# EAGLE board p128control (EAGLE 9.6.2)
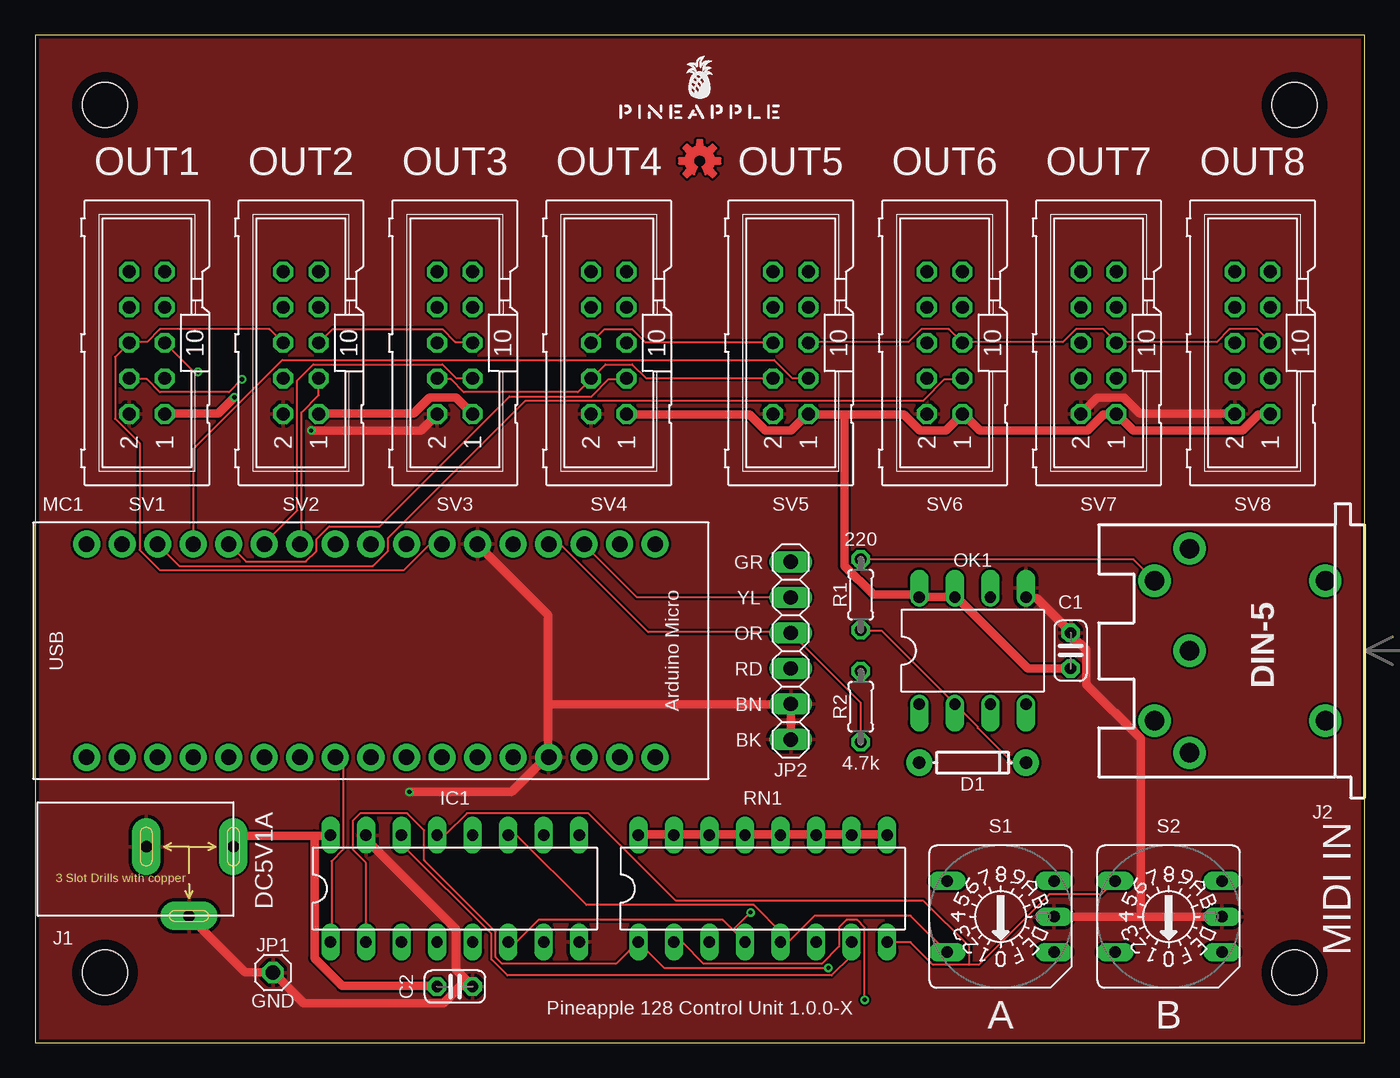
[diagram p0: board, top side]
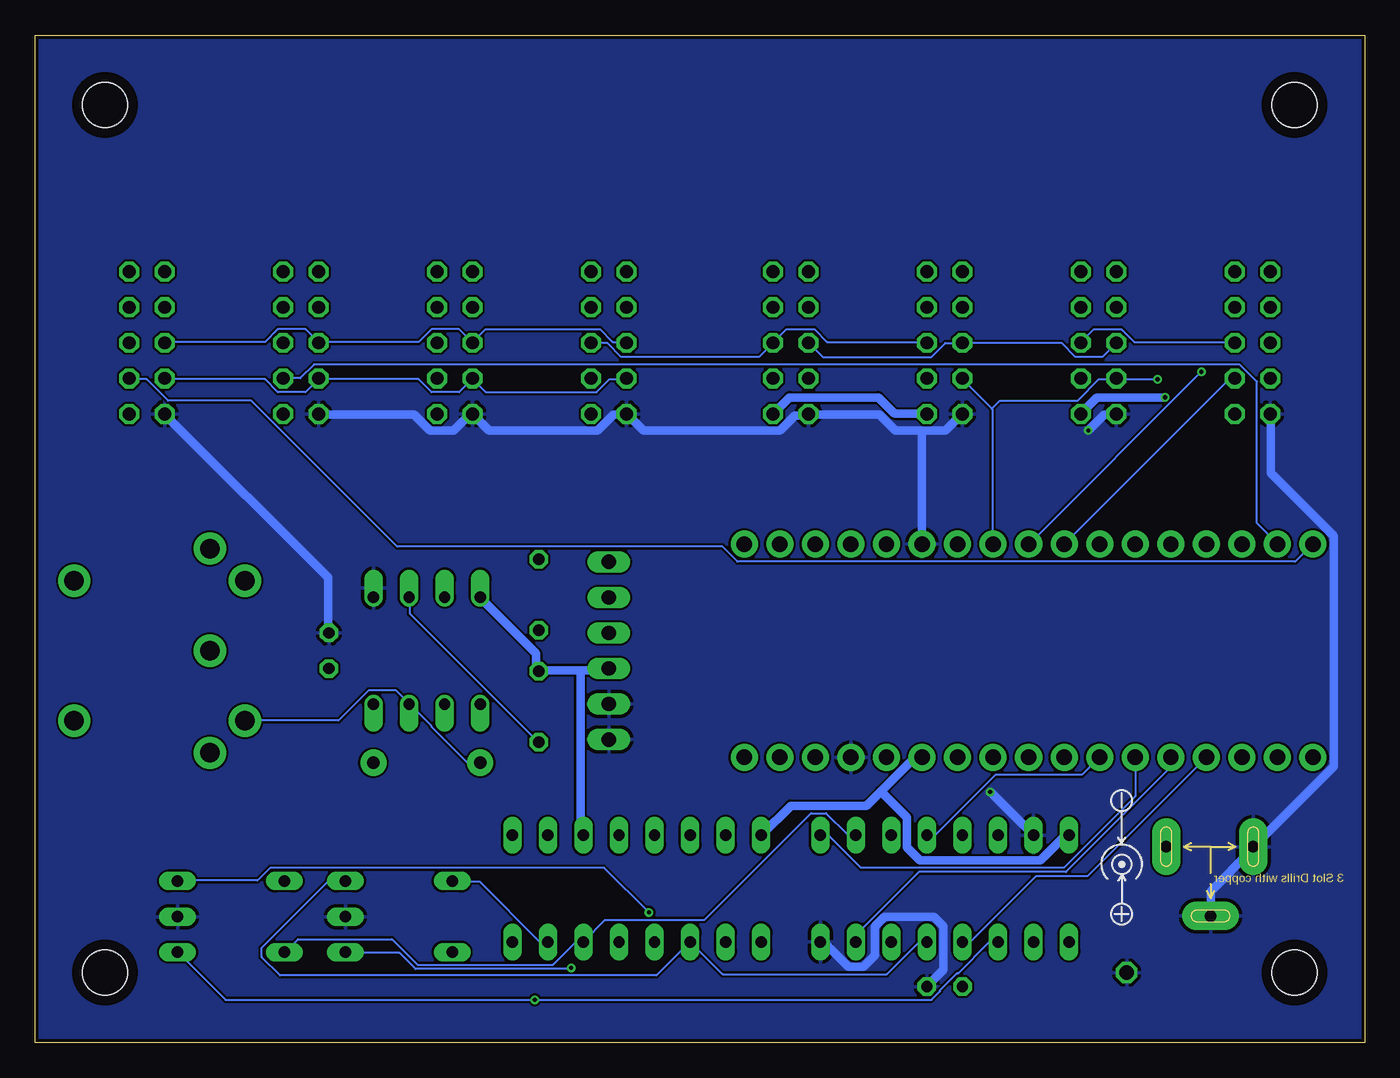
[diagram p1: board, bottom side, seen from below]

Size 95 x 72 mm. Coordinates in mm from the lower left corner, seen from the top.
Outline: 0,0 95,0 95,72 0,72 0,0
Copper layers (1*16): Top 0.035mm / dielectric 1.5mm / Bottom 0.035mm
Design rules "SeeedStudio_2layer_DRU_no_angle_20140221": minimum track width 6mil, minimum drill 12mil, track to track 6mil, track to pad 6mil, pad to pad 6mil, via to via 6mil, smd to smd 0mil, copper to edge 10mil, drill to drill 10mil, minimum pad ring 10mil, minimum via ring 6mil, stop-mask expansion 2mil, vias tented up to drill 100mil, thermal gap 10mil
Net classes: 0 default: width 0.152 mm, drill 0.152 mm, clearance 0.152 mm; 1 gnd: width 0.61 mm, drill 0.152 mm, clearance 0.152 mm; 2 power: width 0.61 mm, drill 0.152 mm, clearance 0.152 mm; 3 analog: width 0.305 mm, drill 0.152 mm, clearance 0.152 mm
Holes 3.2 mm at 5,5 90,5 90,67 5,67
tRestrict: area 2.8,64.8 to 7.2,69.2; area 87.8,64.8 to 92.2,69.2; area 2.8,2.8 to 7.2,7.2; area 87.8,2.8 to 92.2,7.2
bRestrict: area 2.8,2.8 to 7.2,7.2; area 87.8,2.8 to 92.2,7.2; area 87.8,64.8 to 92.2,69.2; area 2.8,64.8 to 7.2,69.2

## Footprints (pad centres in the part's own frame; a part is rotated, then mirrored left to right if it is on the bottom)
C025-024X044 = drill 0.813 octagon: 1 -1.27,0; 2 1.27,0
DIODE-1N4148 = drill 0.9 pad 1.88: A -3.81,0; C 3.81,0
DIL16 = drill 0.813 long: 1 -8.89,-3.81; 2 -6.35,-3.81; 3 -3.81,-3.81; 4 -1.27,-3.81; 5 1.27,-3.81; 6 3.81,-3.81; 7 6.35,-3.81; 8 8.89,-3.81; 9 8.89,3.81; 10 6.35,3.81; 11 3.81,3.81; 12 1.27,3.81; 13 -1.27,3.81; 14 -3.81,3.81; 15 -6.35,3.81; 16 -8.89,3.81
3P-L14.2*W11.0*H9.0MM = drill 0.813 pad 2.032 long: + 3.175,0; -1 -3.048,0; -2 0,-4.953
DIN5-RA-PTH = drill 1.4 pad 2.286: 1 7.3,12.5; 2 0,12.5; 3 -7.3,12.5; 4 5,15; 5 -5,15; 6 -5,2.8; 7 5,2.8
1X01 = drill 1.016 octagon: 1 0,0
1X06 = drill 1.016 long: 1 -6.35,0; 2 -3.81,0; 3 -1.27,0; 4 1.27,0; 5 3.81,0; 6 6.35,0
DIL08 = drill 0.813 offset: 1 -3.81,-3.81; 2 -1.27,-3.81; 3 1.27,-3.81; 4 3.81,-3.81; 5 3.81,3.81; 6 1.27,3.81; 7 -1.27,3.81; 8 -3.81,3.81
0204/5 = drill 0.813 octagon: 1 -2.54,0; 2 2.54,0
A1353HEX = drill 0.813 long: 1 3.81,-2.54; 2 -3.81,2.54; 4 3.81,2.54; 8 -3.81,-2.54; C 3.81,0
ML10 = drill 0.914 octagon: 1 -5.08,-1.27; 2 -5.08,1.27; 3 -2.54,-1.27; 4 -2.54,1.27; 5 0,-1.27; 6 0,1.27; 7 2.54,-1.27; 8 2.54,1.27; 9 5.08,-1.27; 10 5.08,1.27
ARDUINOMICRO = drill 1.1 pad 1.93: P$1 -20.32,7.62; P$2 -17.78,7.62; P$3 -15.24,7.62; P$4 -12.7,7.62; P$5 -10.16,7.62; P$6 -7.62,7.62; P$7 -5.08,7.62; P$8 -2.54,7.62; P$9 0,7.62; P$10 2.54,7.62; P$11 5.08,7.62; P$12 12.7,-7.62; P$13 10.16,-7.62; P$14 12.7,7.62; P$15 15.24,7.62; P$16 17.78,7.62; P$17 20.32,7.62; P$18 20.32,-7.62; P$19 17.78,-7.62; P$20 15.24,-7.62; P$21 7.62,7.62; P$22 10.16,7.62; P$23 7.62,-7.62; P$24 5.08,-7.62; P$25 2.54,-7.62; P$26 0,-7.62; P$27 -2.54,-7.62; P$28 -5.08,-7.62; P$29 -7.62,-7.62; P$30 -10.16,-7.62; P$31 -12.7,-7.62; P$32 -15.24,-7.62; P$33 -17.78,-7.62; P$34 -20.32,-7.62

## Placement (x,y rotation side)
C1  [C025-024X044]  74,28 90 top
C2  [C025-024X044]  30,4 0 top
D1  200mA/100V/1V  [DIODE-1N4148]  67,20 0 top
IC1  74LS158N  [DIL16]  30,11 0 top
J1  [3P-L14.2*W11.0*H9.0MM]  11,14 0 top
J2  DIN5  [DIN5-RA-PTH]  95,28 90 top
JP1  GNDPIN  [1X01]  17,5 0 top
JP2  [1X06]  54,28 90 top
LOGO1  OSHW-LOGOS-COPPER  [OSHW-LOGO-S_COPPER]  47.5,63 0 top
OK1  6N137  [DIL08]  67,28 0 top
R1  220  [0204/5]  59,32 90 top
R2  10k  [0204/5]  59,24 90 top
RN1  10k  [DIL16]  52,11 0 top
S1  [A1353HEX]  69,9 0 top
S2  [A1353HEX]  81,9 0 top
SV1  [ML10]  8,50 90 top
SV2  [ML10]  19,50 90 top
SV3  [ML10]  30,50 90 top
SV4  [ML10]  41,50 90 top
SV5  [ML10]  54,50 90 top
SV6  [ML10]  65,50 90 top
SV7  [ML10]  76,50 90 top
SV8  [ML10]  87,50 90 top
U$1  PINEAPPLE450_SILK  [PINEAPPLE450_SILK]  47.5,66 0 top
U$2  ARDUINOMICRO  [ARDUINOMICRO]  24,28 0 top

## Library data of the parts
C1 C2 R1 R2 = resistor
D1 = SparkFun-DiscreteSemi; PROD_ID: DIO-08378
IC1 = 74xx-us
J1 = Seeed-Connector
J2 = SparkFun-Connectors; PROD_ID: CONN-09481
JP1 JP2 = pinhead
LOGO1 = SparkFun-Aesthetics
OK1 = optocoupler; MPN: 6N137; OC_FARNELL: 1328376; OC_NEWARK: 52M1895
RN1 = resistor-dil; OC_FARNELL: unknown; OC_NEWARK: unknown
S1 S2 = switch-dil; OC_FARNELL: unknown; OC_NEWARK: unknown
SV1-SV8 = con-ml; OC_FARNELL: unknown; OC_NEWARK: unknown
U$1 = pineapple
U$2 = adafruit

## Nets
CLR: SV1.6 SV2.6 SV3.6 SV4.6 SV5.6 SV6.6 SV7.6 SV8.6 U$2.P$11
GND [gnd]: C1.2 C2.2 IC1.8 IC1.15 J1.-1 J1.-2 JP1.1 JP2.1 JP2.2 OK1.5 S1.C S2.C SV1.2 SV2.2 SV3.2 SV4.2 SV5.2 SV6.2 SV7.2 SV8.2 U$2.P$12 U$2.P$21
MIRETN: D1.A J2.5 OK1.3
MISEND: J2.4 R1.2
N$1: D1.C OK1.2 R1.1
RCLK: SV1.5 SV2.5 SV3.5 SV4.5 SV5.5 SV6.5 SV7.5 SV8.5 U$2.P$9
RX: JP2.4 OK1.6 R2.1 U$2.P$14
SCLK: SV1.4 SV2.4 SV3.4 SV4.4 SV5.4 SV6.4 SV7.4 SV8.4 U$2.P$10
SOUT1: SV1.3 U$2.P$8
SOUT2: SV2.3 U$2.P$7
SOUT3: SV3.3 U$2.P$6
SOUT4: SV4.3 U$2.P$5
SOUT5: SV5.3 U$2.P$4
SOUT6: SV6.3 U$2.P$3
SOUT7: SV7.3 U$2.P$2
SOUT8: SV8.3 U$2.P$1
SW1: IC1.4 U$2.P$31
SW2: IC1.7 U$2.P$30
SW4: IC1.9 U$2.P$29
SW8: IC1.12 U$2.P$28
SWA1: IC1.2 RN1.1 S1.1
SWA2: IC1.5 RN1.3 S1.4
SWA4: IC1.11 RN1.5 S1.8
SWA8: IC1.14 RN1.7 S1.2
SWB1: IC1.3 RN1.2 S2.1
SWB2: IC1.6 RN1.4 S2.4
SWB4: IC1.10 RN1.6 S2.8
SWB8: IC1.13 RN1.8 S2.2
SWSEL: IC1.1 U$2.P$27
TX: JP2.5 U$2.P$15
VCC [power]: C1.1 C2.1 IC1.16 J1.+ JP2.3 OK1.7 OK1.8 R2.2 RN1.9 RN1.10 RN1.11 RN1.12 RN1.13 RN1.14 RN1.15 RN1.16 SV1.1 SV2.1 SV3.1 SV4.1 SV5.1 SV6.1 SV7.1 SV8.1 U$2.P$23

## Tracks (layer width: path | path; a pad name or v marks a point on that pad's centre or on a via)
CLR
  Top 0.152: SV2.6 17.68,50.06 16.76,50.98 8.91,50.98 8,50.06 6.78,50.06 SV1.6 6.71,49.99 5.71,49 5.71,44.58 7.47,42.82 7.47,35.2 8.91,33.76 26.36,33.76 28.19,35.59 29.03,35.59 U$2.P$11 | SV5.6 52.65,50.06 43.59,50.06 42.67,50.98 40.69,50.98 39.78,50.06 SV4.6
  Bottom 0.152: SV5.6 52.73,50.06 53.72,50.06 54.63,50.98 62.79,50.98 63.7,50.06 SV6.6 63.78,50.06 64.69,50.98 66.67,50.98 67.59,50.06 74.68,50.06 SV7.6 74.75,50.06 75.67,50.98 77.65,50.98 78.56,50.06 85.72,50.06 SV8.6 | SV4.6 39.7,49.99 38.71,49 30.94,49 29.95,49.99 28.8,49.99 SV3.6 28.65,49.99 21.64,49.99 20.65,49 18.75,49 17.75,49.99 SV2.6
GND  (via drill 0.3)
  Top 0.61: IC1.15 23.7,14.78 23.7,14.48 30.1,8.08 30.1,5.18 31.24,4.04 C2.2 30.63,4.27 29.18,2.82 19.2,2.82 17.22,4.8 JP1.1 16.99,5.03 15.01,5.03 11.05,8.99 J1.-2 | JP2.1 54.03,21.72 54.03,24.16 JP2.2 53.72,24.16 36.65,24.16 | v19.74,43.74 27.58,43.74 28.73,44.88 SV3.2 | 36.65,24.16 36.65,30.56 31.62,35.59 U$2.P$21 | 36.65,24.16 36.65,20.42 U$2.P$12 36.42,20.27 34.06,17.91 v26.75,17.91 | 79.02,8.99 84.73,8.99 S2.C | 79.02,8.99 72.85,8.99 S1.C | OK1.5 70.87,31.77 71.55,31.77 73.99,29.34 C1.2 74.14,29.03 75.13,28.04 75.13,25.6 79.02,21.72 79.02,8.99 | SV8.2 85.72,44.96 78.94,44.96 77.8,46.1 75.89,46.1 74.75,44.96 SV7.2
  Bottom 0.61: IC1.8 38.86,7.16 38.63,7.16 36.88,5.41 35.81,5.41 34.98,6.25 34.98,8.31 34.29,8.99 30.79,8.99 30.1,8.31 30.1,5.18 31.24,4.04 C2.2 | SV1.2 6.71,44.88 6.71,40.69 2.21,36.2 2.21,19.74 7.92,14.02 J1.-1 8.08,13.72 10.97,10.82 10.97,9.07 J1.-2 | v19.74,43.74 18.59,44.88 17.75,44.88 SV2.2 | 31.62,43.74 29.95,43.74 28.8,44.88 SV3.2 | 31.62,43.74 33.53,43.74 34.67,44.88 39.7,44.88 SV4.2 40.01,44.81 40.69,44.81 41.76,43.74 51.51,43.74 52.5,44.73 SV5.2 52.73,44.88 53.65,44.88 54.79,43.74 62.56,43.74 63.7,44.88 SV6.2 64.01,44.81 65.08,43.74 66.75,43.74 67.89,44.88 74.68,44.88 SV7.2 | 31.62,43.74 31.62,35.66 U$2.P$21 | C1.2 74.07,29.34 74.07,33.22 85.72,44.88 SV8.2 | v26.75,17.91 23.7,14.86 IC1.15
  pour Top: -1,-1 96,-1 96,73 -1,73
  pour Bottom: -2,-2 97,-2 97,74 -2,74
MIRETN
  Bottom 0.152: D1.A 63.25,20.04 64.16,20.04 66.67,22.55 66.67,22.63 68.2,24.16 OK1.3 68.28,24.23 69.19,25.15 71.17,25.15 73.3,23.01 79.93,23.01 J2.5
MISEND
  Top 0.152: R1.2 59.05,34.52 78.49,34.52 79.93,33.07 J2.4
N$1
  Top 0.152: D1.C 70.79,20.04 69.8,20.04 67.36,22.48 67.36,22.55 65.76,24.16 OK1.2 65.68,24.23 60.5,29.41 59.05,29.41 R1.1
RCLK  (via drill 0.3)
  Top 0.152: SV5.5 55.32,50.06 62.41,50.06 63.32,50.98 65.3,50.98 66.22,50.06 SV6.5 66.29,50.06 73.46,50.06 74.37,50.98 76.35,50.98 77.27,50.06 SV7.5 77.34,50.06 84.43,50.06 85.34,50.98 87.33,50.98 88.24,50.06 SV8.5 | v11.66,47.93 11.35,47.93 9.3,49.99 SV1.5 | SV3.5 31.24,50.06 30.02,50.06 29.11,50.98 21.26,50.98 20.34,50.06 SV2.5
  Bottom 0.152: SV3.5 31.32,50.06 38.41,50.06 39.32,50.98 41.3,50.98 42.22,50.06 SV4.5 42.29,49.99 43.28,49 53.11,49 54.1,49.99 55.24,49.99 SV5.5 | SV1.5 9.3,50.06 16.46,50.06 17.37,50.98 19.36,50.98 20.27,50.06 SV2.5 | v11.66,47.93 23.93,35.66 U$2.P$9
RX
  Top 0.152: R2.1 58.98,21.49 58.98,24.31 54.03,29.26 JP2.4 53.95,29.34 43.81,29.34 37.57,35.59 36.73,35.59 U$2.P$14
  Bottom 0.152: OK1.6 68.2,31.77 68.2,30.63 59.05,21.49 R2.1
SCLK  (via drill 0.3)
  Top 0.152: v14.78,47.4 13.87,46.48 8.91,46.48 8,47.4 6.78,47.4 SV1.4 | SV3.4 28.8,47.4 29.72,47.4 30.63,46.48 38.79,46.48 39.7,47.4 SV4.4 39.78,47.47 40.77,48.46 42.67,48.46 43.66,47.47 52.65,47.47 SV5.4
  Bottom 0.152: SV5.4 52.73,47.4 53.95,47.4 54.86,46.48 62.79,46.48 63.7,47.4 SV6.4 63.78,47.4 64.69,46.48 66.67,46.48 67.59,47.4 74.68,47.4 SV7.4 74.75,47.4 75.67,46.48 77.65,46.48 78.56,47.4 85.72,47.4 SV8.4 | v14.78,47.4 17.68,47.4 SV2.4 17.75,47.4 18.97,47.4 20.5,45.87 26.06,45.87 26.63,45.3 | 26.63,45.3 28.73,47.4 SV3.4 | 26.63,45.3 26.59,45.26 26.59,35.66 U$2.P$10
SOUT1
  Bottom 0.152: SV1.3 9.3,47.4 9.68,47.4 21.41,35.66 U$2.P$8
SOUT2
  Top 0.152: SV2.3 20.27,47.4 20.27,46.25 19.05,45.03 19.05,35.74 18.97,35.66 U$2.P$7
SOUT3
  Top 0.152: SV3.3 31.24,47.47 30.1,47.47 29.11,48.46 19.89,48.46 18.75,47.32 18.75,38.02 16.38,35.66 U$2.P$6
SOUT4
  Top 0.152: SV4.3 42.22,47.4 41,47.4 39.78,46.18 33.91,46.18 24.61,36.88 21.03,36.88 20.12,35.97 20.12,35.13 19.36,34.37 15.09,34.37 13.87,35.59 U$2.P$5
SOUT5
  Top 0.152: SV5.3 55.24,47.47 54.1,47.47 52.81,48.77 17.68,48.77 11.35,42.44 11.35,35.66 U$2.P$4
SOUT6
  Top 0.152: SV6.3 66.22,47.4 65,47.4 63.48,45.87 35.05,45.87 25.22,36.04 25.22,35.13 24.16,34.06 10.29,34.06 8.76,35.59 U$2.P$3
SOUT7
  Bottom 0.152: SV7.3 77.27,47.47 76.05,47.47 75.06,48.46 8.91,48.46 7.7,47.24 7.7,37.11 6.25,35.66 U$2.P$2
SOUT8
  Bottom 0.152: SV8.3 88.24,47.4 87.02,47.4 85.5,45.87 79.55,45.87 69.11,35.43 45.87,35.43 44.81,34.37 4.95,34.37 3.73,35.59 U$2.P$1
SW1
  Bottom 0.152: IC1.4 28.73,7.24 28.12,7.24 23.47,11.89 19.81,11.89 11.35,20.34 U$2.P$31
SW2
  Bottom 0.152: IC1.7 36.35,7.24 36.35,7.7 31.85,12.19 21.34,12.19 13.87,19.66 13.87,20.34 U$2.P$30
SW4
  Bottom 0.152: IC1.9 38.86,14.78 38.25,14.78 35.97,12.5 21.49,12.5 16.38,17.6 16.38,20.34 U$2.P$29
SW8
  Bottom 0.152: IC1.12 31.24,14.86 30.63,14.86 26.36,19.13 20.19,19.13 18.97,20.34 U$2.P$28
SWA1  (via drill 0.3)
  Top 0.152: IC1.2 23.62,7.24 23.62,12.88 22.71,13.79 22.71,15.85 23.24,16.38 26.59,16.38 27.81,15.16 27.81,13.03 32.92,7.92 32.92,6.1 33.38,5.64 41.53,5.64 43.05,7.16 RN1.1 43.13,7.16 44.96,5.33 v56.69,5.33
  Bottom 0.152: v56.69,5.33 56.77,5.26 67.82,5.26 68.96,6.4 72.77,6.4 S1.1
SWA2
  Bottom 0.152: IC1.5 31.32,7.16 31.85,7.16 34.14,4.88 45.87,4.88 48.16,7.16 RN1.3 48.23,7.16 50.6,4.8 77.5,4.8 78.79,6.1 78.79,6.78 74.07,11.51 72.85,11.51 S1.4
SWA4
  Top 0.152: S1.8 65.15,6.48 62.56,9.07 55.7,9.07 53.87,7.24 53.34,7.24 RN1.5 53.34,7.32 53.34,7.85 51.36,9.83 39.4,9.83 34.44,14.78 33.83,14.78 IC1.11
SWA8
  Top 0.152: IC1.14 26.21,14.78 26.21,14.17 32.61,7.77 32.61,5.94 33.76,4.8 56.92,4.8 58.29,6.17 58.29,7.16 RN1.7
  Bottom 0.152: RN1.7 58.37,7.24 58.98,7.24 63.25,11.51 65.15,11.51 S1.2
SWB1  (via drill 0.3)
  Top 0.152: v59.28,3.05 59.28,8.23 58.75,8.76 57.99,8.76 57.45,8.23 57.45,6.86 56.24,5.64 47.78,5.64 46.25,7.16 45.72,7.16 RN1.2
  Bottom 0.152: IC1.3 26.21,7.16 26.82,7.16 29.03,4.95 29.11,4.95 30.33,3.73 30.33,3.66 30.94,3.05 v59.28,3.05 81.38,3.05 84.73,6.4 S2.1
SWB2  (via drill 0.3)
  Top 0.152: 49.87,8.04 50.67,7.24 RN1.4 | 49.87,8.04 49.15,8.76 35.97,8.76 34.44,7.24 33.83,7.24 IC1.6 | 49.87,8.04 v51.13,9.3
  Bottom 0.152: v51.13,9.3 54.33,12.5 78.18,12.5 79.1,11.58 84.73,11.58 S2.4
SWB4
  Bottom 0.152: S2.8 77.11,6.48 76.2,7.39 69.49,7.39 67.67,5.56 57.99,5.56 56.39,7.16 55.85,7.16 RN1.6 55.78,7.24 54.25,8.76 47.17,8.76 39.55,16.38 38.48,16.38 36.96,14.86 36.42,14.86 IC1.10
SWB8
  Top 0.152: 66.75,5.56 67.44,5.56 72.47,10.59 76.2,10.59 77.11,11.51 S2.2 | 66.75,5.56 64.16,5.56 62.56,7.16 60.96,7.16 RN1.8 | 66.75,5.56 66.75,6.86 63.48,10.13 45.8,10.13 39.55,16.38 30.86,16.38 29.34,14.86 28.8,14.86 IC1.13
SWSEL
  Top 0.152: IC1.1 21.18,7.24 21.18,12.95 22.02,13.79 22.02,19.81 21.49,20.34 U$2.P$27
TX
  Top 0.152: JP2.5 53.95,31.85 42.98,31.85 39.24,35.59 U$2.P$15
VCC  (via drill 0.3)
  Top 0.61: v14.25,46.1 13.11,44.96 9.3,44.96 SV1.1 | SV2.1 20.34,44.96 27.05,44.96 28.19,46.1 30.1,46.1 31.24,44.96 SV3.1 | 57.84,44.88 62.1,44.88 63.25,43.74 65.08,43.74 66.22,44.88 SV6.1 66.52,44.73 67.51,43.74 75.21,43.74 76.35,44.88 77.27,44.88 SV7.1 77.5,44.73 78.49,43.74 86.26,43.74 87.4,44.88 88.24,44.88 SV8.1 | 57.84,44.88 55.32,44.88 SV5.1 55.02,44.73 54.03,43.74 52.2,43.74 51.05,44.88 42.29,44.88 SV4.1 | 19.96,14.78 15.01,14.78 14.25,14.02 J1.+ | 19.96,14.78 21.11,14.78 IC1.16 | 19.96,14.78 19.96,6.02 21.95,4.04 28.73,4.04 C2.1 | C1.1 73.99,26.75 70.94,26.75 65.99,31.7 OK1.7 65.68,31.85 63.25,31.85 OK1.8 62.94,32 59.89,32 57.84,34.06 57.84,44.88 | RN1.16 43.13,14.86 45.64,14.86 RN1.15 45.95,14.86 48.16,14.86 RN1.14 48.46,14.86 50.67,14.86 RN1.13 50.98,14.86 53.26,14.86 RN1.12 53.57,14.86 55.78,14.86 RN1.11 56.08,14.86 58.29,14.86 RN1.10 58.6,14.86 60.88,14.86 RN1.9
  Bottom 0.61: v14.25,46.1 19.13,46.1 20.27,44.96 SV2.1 | SV3.1 31.32,44.96 33.6,44.96 34.75,46.1 41.07,46.1 42.22,44.96 SV4.1 | 56.01,26.59 54.1,26.59 54.03,26.67 JP2.3 | 56.01,26.59 58.98,26.59 R2.2 59.21,26.82 59.21,27.81 63.17,31.77 OK1.8 | 34.56,17.95 35.59,16.92 41,16.92 43.05,14.86 RN1.16 | 34.56,17.95 32.16,20.34 31.62,20.34 U$2.P$23 | 56.01,26.59 56.01,15.01 55.85,14.86 RN1.11 | 34.56,17.95 32.69,16.08 32.69,13.95 31.77,13.03 23.16,13.03 21.41,14.78 21.18,14.78 IC1.16

## Text on the board
tNames: OUT1 | OUT2 | OUT3 | OUT4 | OUT5 | OUT6 | OUT7 | OUT8 | MC1 | 220 | GR | YL | OR | USB | Arduino Micro | RD | BN | BK | 4.7k | DC5V1A | MIDI IN | GND | Pineapple 128 Control Unit 1.0.0-X | A | B